# EAGLE board Lasermodul (EAGLE 7.2.0)
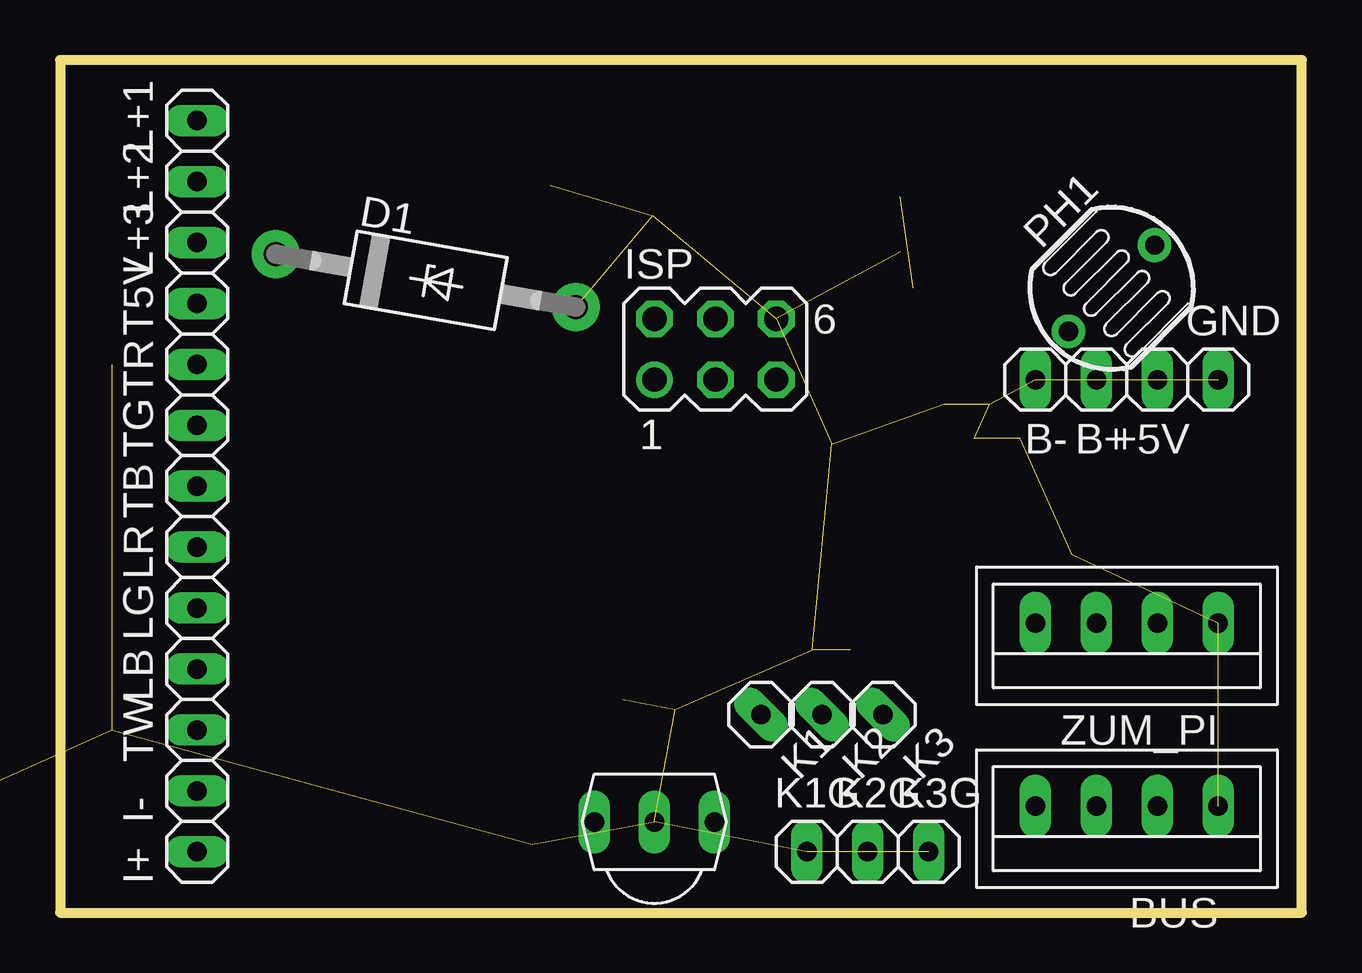
[diagram p0: board, top side]
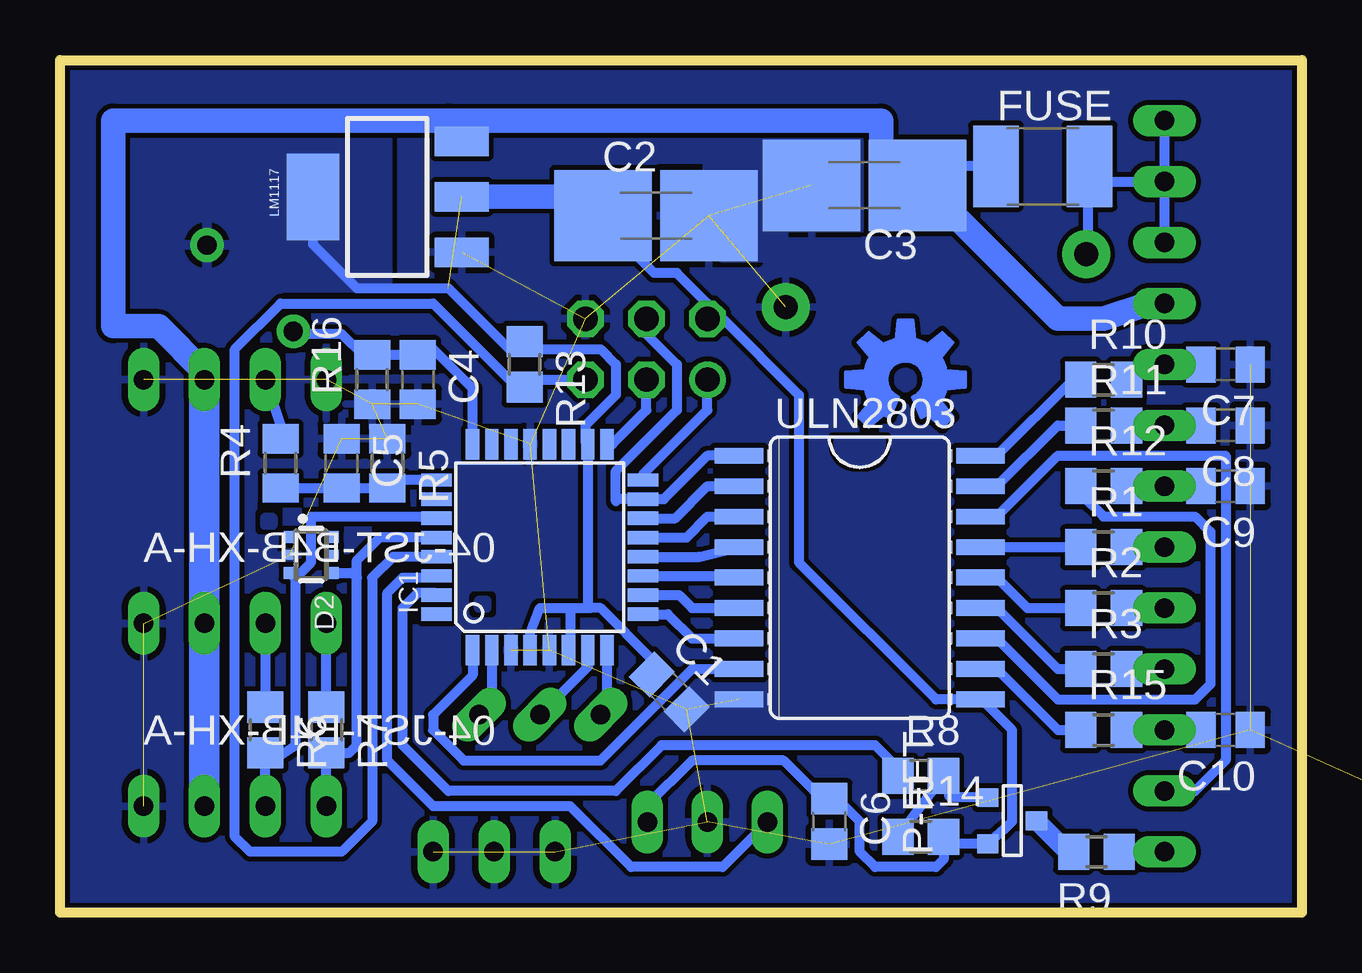
[diagram p1: board, bottom side, seen from below]

Size 51.74 x 35.55 mm. Coordinates in mm from the lower left corner, seen from the top.
Outline: 0,0 51.74,0 51.74,35.55 0,35.55 0,0
Copper layers (1*16): Top 0.035mm / dielectric 1.5mm / Bottom 0.035mm
Design rules "cnc *": minimum track width 10mil, minimum drill 0.1mm, track to track 8mil, track to pad 8mil, pad to pad 8mil, via to via 8mil, smd to smd 8mil, copper to edge 8mil, drill to drill 8mil, minimum pad ring 10mil, minimum via ring 8mil, stop-mask expansion 4mil, vias tented up to drill 0mil, thermal gap 10mil
Net classes: 0 default: width 0.016 mm

## Footprints (pad centres in the part's own frame; a part is rotated, then mirrored left to right if it is on the bottom)
1X01 = drill 0.813 long: 1 0,0
B4B-XH = drill 0.813 long: P$1 -3.81,0; P$2 -1.27,0; P$3 1.27,0; P$4 3.81,0
C0805 = smd 1.224 x 1.5: 1 -1.026,0; 2 1.026,0
C1808 = smd 4.064 x 3.81: 1 -2.204,0; 2 2.204,0
C0805' = smd 1.3 x 1.5: 1 -0.95,0; 2 0.95,0
C_UNIVERSAL = smd 4.064 x 3.81: 1 -2.204,0; 2 2.204,0
F126Z12 = drill 1 pad 2: A 6.35,0; C -6.35,0
SOT363 = smd 0.5 x 0.5: 1 -0.75,-0.9; 3 0.75,-0.9; 4 0.75,0.9; 6 -0.75,0.9 | smd 0.4 x 0.5: 2 0,-0.9; 5 0,0.9
L1812 = smd 1.9 x 3.4: 1 -1.95,0; 2 1.95,0
TQFP32-08 = smd 1.27 x 0.559: 1 -4.293,2.8; 2 -4.293,2; 3 -4.293,1.2; 4 -4.293,0.4; 5 -4.293,-0.4; 6 -4.293,-1.2; 7 -4.293,-2; 8 -4.293,-2.8; 17 4.293,-2.8; 18 4.293,-2; 19 4.293,-1.2; 20 4.293,-0.4; 21 4.293,0.4; 22 4.293,1.2; 23 4.293,2; 24 4.293,2.8 | smd 0.559 x 1.27: 9 -2.8,-4.293; 10 -2,-4.293; 11 -1.2,-4.293; 12 -0.4,-4.293; 13 0.4,-4.293; 14 1.2,-4.293; 15 2,-4.293; 16 2.8,-4.293; 25 2.8,4.293; 26 2,4.293; 27 1.2,4.293; 28 0.4,4.293; 29 -0.4,4.293; 30 -1.2,4.293; 31 -2,4.293; 32 -2.8,4.293
TO263-5 = smd 1.067 x 2.159: 1 -3.404,-5.791; 2 -1.702,-5.791; 3 0,-5.791; 4 1.702,-5.791; 5 3.404,-5.791 | smd 10.8 x 10.41: 6 0,2.54
MA03-2 = drill 1.016: 1 -2.54,-1.27 | drill 1.016 octagon: 2 -2.54,1.27; 3 0,-1.27; 4 0,1.27; 5 2.54,-1.27; 6 2.54,1.27
SOT223 = smd 1.219 x 2.235: 1 -2.311,-3.099; 2 0,-3.099; 3 2.311,-3.099 | smd 3.6 x 2.2: 4 0,3.099
SOT-23 = smd 0.787 x 0.889: 1 0.025,-1.016; 2 -0.94,1.016; 3 0.991,1.016
VT800 = drill 0.8 pad 1.4: 1 -2.54,0; 2 2.54,0
R0805 = smd 1.3 x 1.5: 1 -0.95,0; 2 0.95,0
R0805' = smd 1.224 x 1.5: 1 -1.026,0; 2 1.026,0
TSOP18XX = drill 0.813 long: GND -0.001,-0.027; OUT -2.501,-0.027; VCC 2.499,-0.027
SO18W = smd 0.66 x 2.032: 1 -5.08,-5.029; 2 -3.81,-5.029; 3 -2.54,-5.029; 4 -1.27,-5.029; 5 0,-5.029; 6 1.27,-5.029; 7 2.54,-5.029; 8 3.81,-5.029; 9 5.08,-5.029; 10 5.08,5.029; 11 3.81,5.029; 12 2.54,5.029; 13 1.27,5.029; 14 0,5.029; 15 -1.27,5.029; 16 -2.54,5.029; 17 -3.81,5.029; 18 -5.08,5.029

## Placement (x,y rotation side)
+5V  [1X01]  45.72,22.23 180 top
B+  [1X01]  43.18,22.23 180 top
B-  [1X01]  40.64,22.23 180 top
BUS  04-JST-B4B-XH-A  [B4B-XH]  44.45,4.45 180 top
C1  100n  [C0805]  26.35,9.21 315 bottom
C2  100u  [C1808]  26.91,29.06 0 bottom
C3  100u  [C1808]  18.21,30.33 180 bottom
C4  100n  [C0805]  36.83,22.23 270 bottom
C5  100n  [C0805]  40.01,18.73 270 bottom
C6  100n  [C0805']  19.68,3.81 270 bottom
C7  5u  [C0805]  3.17,22.86 180 bottom
C8  5u  [C0805]  3.17,20.32 180 bottom
C9  5u  [C0805]  3.17,17.78 180 bottom
C10  5u  [C0805]  3.17,7.62 180 bottom
C11  [C_UNIVERSAL]  -12.7,-5.08 0 top  (outside the outline)
D1  5,6V  [F126Z12]  15.24,26.35 350 top
D2  [SOT363]  41.27,14.92 270 bottom
FUSE  PTC  [L1812]  10.79,31.11 0 bottom
GND  [1X01]  48.26,22.23 0 top
I+  [1X01]  5.71,2.54 90 top
I-  [1X01]  5.71,5.08 90 top
IC1  MEGA8-AI  [TQFP32-08]  31.75,15.24 90 bottom
IC2  XL6009S  [TO263-5]  -10.16,6.35 0 top  (outside the outline)
ISP  [MA03-2]  27.3,23.5 0 top
K1  [1X01]  29.21,8.26 225 top
K1G  [1X01]  31.11,2.54 0 top
K2  [1X01]  31.75,8.26 225 top
K2G  [1X01]  33.66,2.54 0 top
K3  [1X01]  34.29,8.26 225 top
K3G  [1X01]  36.2,2.54 0 top
L+1  [1X01]  5.71,33.02 90 top
L+2  [1X01]  5.71,30.48 90 top
L+3  [1X01]  5.71,27.94 90 top
LB  [1X01]  5.71,10.16 90 top
LG  [1X01]  5.71,12.7 90 top
LM1117  V_REG_MIC2920  [SOT223]  38.1,29.84 90 bottom
LOGO1  OSHW-LOGOM  [OSHW-LOGO-M]  16.51,22.23 0 top
LR  [1X01]  5.71,15.24 90 top
P-FET  [SOT-23]  12.06,3.81 90 bottom
PH1  VT80N1  [VT800]  43.81,26.04 225 top
R1  100  [R0805]  8.26,15.24 0 bottom
R2  [R0805]  8.26,12.7 0 bottom
R3  [R0805]  8.26,10.16 0 bottom
R4  120k  [R0805']  42.55,18.73 90 bottom
R5  10k  [R0805']  38.1,18.73 270 bottom
R6  100  [R0805]  43.18,7.62 270 bottom
R7  100  [R0805]  40.64,7.62 270 bottom
R8  10  [R0805]  15.88,5.71 0 bottom
R9  10  [R0805]  8.55,2.54 180 bottom
R10  6R9 (10 || 22)  [R0805]  8.26,22.23 0 bottom
R11  4R7  [R0805]  8.26,20.32 0 bottom
R12  4R7  [R0805]  8.26,17.78 0 bottom
R13  10k  [R0805]  32.38,22.86 270 bottom
R14  10k  [R0805]  15.88,3.17 0 bottom
R15  4R7  [R0805]  8.26,7.62 0 bottom
R16  10k  [R0805']  38.73,22.23 90 bottom
T5V  [1X01]  5.71,25.4 90 top
TB  [1X01]  5.71,17.78 90 top
TG  [1X01]  5.71,20.32 90 top
TR  [1X01]  5.71,22.86 90 top
TW  [1X01]  5.71,7.62 90 top
U$1  TSOP1838  [TSOP18XX]  24.77,3.81 0 top
ULN2803  [SO18W]  18.41,13.97 270 bottom
ZUM_PI  04-JST-B4B-XH-A  [B4B-XH]  44.45,12.06 180 top

## Library data of the parts
+5V B+ B- BUS C1 C4 C5 C7-C11 D1 D2 GND I+ I- IC2 K1 K1G K2 K2G K3 K3G L+1-L+3 LB LG LM1117 LOGO1 LR R4 R5 R16 T5V TB TG TR TW ULN2803 ZUM_PI = wz
C2 C3 = wz_c
C6 R1-R3 R6-R15 = rcl
FUSE = resistor
IC1 = atmel; MPN: ATMEGA8-16AU; OC_FARNELL: 9171371; OC_NEWARK: 73M8863
ISP = con-lstb; OC_FARNELL: unknown; OC_NEWARK: unknown
P-FET = zetex; OC_FARNELL: unknown; OC_NEWARK: unknown
PH1 = photo-elements
U$1 = tsop

## Nets
+3V3: C1.1 C2.1 C6.1 IC1.4 IC1.6 IC1.18 ISP.2 LM1117.2 LM1117.4 P-FET.2 PH1.1 R13.1 R14.2 U$1.VCC ULN2803.10
+5V: +5V.1 BUS.P$2 C3.1 FUSE.1 LM1117.3 T5V.1 ZUM_PI.P$2
GND: B-.1 BUS.P$1 C1.2 C2.2 C3.2 C4.2 C5.1 C6.2 C7.1 C8.1 C9.1 C10.1 D1.A D2.2 GND.1 IC1.3 IC1.5 IC1.21 IC2.1 ISP.6 K1G.1 K2G.1 K3G.1 LM1117.1 R5.1 R16.1 U$1.GND ULN2803.9 ZUM_PI.P$1
IR_TAKT_-: I-.1 ULN2803.16
IR_TX_+: I+.1 R9.1
KEY_1: IC1.8 K1.1
KEY_2: IC1.7 K2.1
KEY_3: IC1.2 K3.1
LASER_+: D1.C FUSE.2 L+1.1 L+2.1 L+3.1
LASER_B: R3.1 ULN2803.13
LASER_G: R2.1 ULN2803.14
LASER_R: R1.1 ULN2803.15
LED_B: R12.1 ULN2803.12
LED_G: R11.1 ULN2803.17
LED_R: R10.1 ULN2803.18
LED_W: R15.1 ULN2803.11
N$1: IC1.15 ISP.4 ULN2803.1
N$2: IC1.14 ULN2803.2
N$3: IC1.13 ULN2803.3
N$4: IC1.12 ULN2803.4
N$7: IC1.11 ULN2803.5
N$8: IC1.1 ULN2803.8
N$9: IC1.10 ULN2803.6
N$10: IC1.9 ULN2803.7
N$11: IC1.16 ISP.1
N$12: LR.1 R1.2
N$13: IC1.17 ISP.3
N$14: C5.2 IC1.25 R4.1 R5.2
N$15: C7.2 R10.2 TR.1
N$16: P-FET.1 R9.2
N$17: IC1.31 R8.1
N$18: LG.1 R2.2
N$19: LB.1 R3.2
N$20: P-FET.3 R8.2 R14.1
N$21: C8.2 R11.2 TG.1
N$22: C9.2 R12.2 TB.1
N$23: C10.2 R15.2 TW.1
N$26: C4.1 IC1.24 PH1.2 R16.2
N$27: R7.1 ZUM_PI.P$4
N$28: R6.1 ZUM_PI.P$3
RESET: IC1.29 ISP.5 R13.2
RX: IC1.30 U$1.OUT
SCL: BUS.P$4 D2.4 IC1.28 R7.2
SDA: BUS.P$3 D2.3 IC1.27 R6.2
V_BATT: B+.1 R4.2
VIN: IC2.4

## Tracks (layer width: path | path; a pad name or v marks a point on that pad's centre or on a via)
+3V3  (1 unrouted)
  Bottom 0.406: 30.48,12.7 30.48,11.02 IC1.6 30.48,10.88 | IC1.4 32.15,11.66 31.75,12.7 30.48,12.7 | ULN2803.10 15.24,8.89 20.95,14.61 20.95,21.59 24.13,24.77 ISP.2 24.77,25.4 26.04,26.67 26.99,26.67 27.62,27.3 27.94,29.02 C2.1 | ULN2803.10 13.34,8.89 12.06,7.62 12.06,3.81 12.37,3.5 P-FET.2 14.6,2.87 R14.2 14.93,2.22 15.24,1.91 17.78,1.91 18.41,2.54 18.41,3.81 19.05,4.45 C6.1 20.32,5.08 21.59,6.35 25.4,6.35 27.3,4.46 U$1.VCC | ULN2803.10 13.97,8.89 | LM1117.4 41.2,27.86 39.37,26.04 35.56,26.04 33.02,23.5 32.7,23.81 R13.1 32.38,23.5 29.21,23.5 28.57,22.86 28.57,21.59 29.84,20.32 29.84,19.63 IC1.18 29.75,12.79 29.66,12.7 | 26.67,10.16 26.9,9.93 C1.1 27.08,10.57 29.21,12.7 29.66,12.7 | 30.48,12.7 29.66,12.7
  Bottom 1.016: C2.1 29.92,29.84 LM1117.2
  pour Bottom: 38.1,32.38 38.1,26.04 42.55,26.04 45.72,22.86 48.9,25.4 48.9,32.38
+5V
  Bottom 0.406: 12.7,31.75 FUSE.1 15.23,31.11 C3.1 | 17.53,31.75 C3.1 | 33.33,33.02 LM1117.3 34.59,31.75 34.67,32.05 | C3.1 15.72,30.33 14.61,29.21
  Bottom 0.61: 35.56,33.02 33.33,33.02
  Bottom 1.016: T5V.1 6.35,25.4 8.26,24.77 10.16,24.77 14.61,29.21 | +5V.1 45.72,22.54 47.62,24.45 49.53,24.45 49.53,33.02 35.56,33.02 | 35.56,33.02 17.53,33.02 17.53,31.75 | 35.56,33.02 34.67,32.05
  Bottom 1.27: BUS.P$2 ZUM_PI.P$2 +5V.1
GND  (28 unrouted)
  pour Bottom (rank 2): 0,35.56 51.44,35.56 51.44,0 0,0
  pour Bottom (no thermals): 17.78,33.02 24.77,33.02 24.77,28.57 arc-90 24.13,27.3 21.59,27.3 21.59,28.57 17.78,28.57
  pour Bottom (no thermals): 22.23,9.53 26.04,9.53 27.3,6.99 22.23,7.62
IR_TAKT_-
  Bottom 0.406: ULN2803.16 12.7,16.51 10.16,19.05 3.17,19.05 3.17,6.35 4.45,5.08 I-.1
IR_TX_+
  Bottom 0.406: I+.1 R9.1
KEY_1
  Bottom 0.406: IC1.8 28.95,8.52 K1.1
KEY_2
  Bottom 0.406: IC1.7 29.75,10.26 K2.1
KEY_3
  Bottom 0.406: IC1.2 33.75,8.79 K3.1
LASER_+
  Bottom 0.406: 9.53,30.48 FUSE.2 8.85,30.52 8.89,30.48 | L+3.1 L+2.1 | L+2.1 L+1.1 | 8.89,30.48 L+2.1 | D1.C 8.89,27.45 8.89,30.48
LASER_B
  Bottom 0.406: ULN2803.13 12.7,12.7 10.16,10.16 R3.1
LASER_G
  Bottom 0.406: ULN2803.14 12.7,13.97 11.43,12.7 R2.1
LASER_R
  Bottom 0.406: ULN2803.15 R1.1
LED_B
  Bottom 0.406: ULN2803.12 12.7,11.43 10.16,8.89 4.45,8.89 3.81,9.53 3.81,15.88 4.45,16.51 8.26,16.51 9.21,17.46 R12.1
LED_G
  Bottom 0.406: ULN2803.17 12.7,17.78 10.16,20.32 R11.1
LED_R
  Bottom 0.406: ULN2803.18 12.7,19.05 9.53,22.23 R10.1
LED_W
  Bottom 0.406: ULN2803.11 12.7,10.16 10.16,7.62 R15.1
N$1
  Bottom 0.406: ISP.4 27.3,24.13 26.04,22.86 26.04,20.95 28.57,18.41 28.57,17.14 28.48,17.24 IC1.15 26.57,17.24 24.77,19.05 ULN2803.1
N$2
  Bottom 0.406: IC1.14 26.11,16.44 24.77,17.78 ULN2803.2
N$3
  Bottom 0.406: IC1.13 25.64,15.64 24.77,16.51 ULN2803.3
N$4
  Bottom 0.406: IC1.12 25.11,14.84 ULN2803.4
N$5
  pour Bottom: 34.29,12.7 34.29,13.02 33.97,13.02 33.97,12.7
N$6
  pour Bottom: 17.46,19.68 19.37,19.68 arc-90 18.41,18.73 arc-90
N$7
  Bottom 0.406: IC1.11 24.15,14.04 ULN2803.5
N$8
  Bottom 0.406: ULN2803.8 25.4,10.16 29.21,6.35 34.92,6.35 36.2,7.62 36.2,8.26 34.55,9.9 IC1.1
N$9
  Bottom 0.406: IC1.10 25.94,13.24 25.4,12.7 ULN2803.6
N$10
  Bottom 0.406: IC1.9 26.41,12.44 25.4,11.43 ULN2803.7
N$11
  Bottom 0.406: IC1.16 27.46,18.26 24.77,20.95 ISP.1
N$12
  Bottom 0.406: LR.1 R1.2
N$13
  Bottom 0.406: IC1.17 28.73,19.53 27.3,20.95 ISP.3
N$14
  Bottom 0.406: R4.1 C5.2 R5.2 37.84,18.04 IC1.25
N$15
  Bottom 0.406: R10.2 6.67,22.86 TR.1 C7.2
N$16
  Bottom 0.406: R9.2 9.75,2.54
  Bottom 0.813: 9.75,2.54 P-FET.1
N$17
  Bottom 0.406: IC1.31 36.14,13.34 36.83,13.34 37.47,12.7 37.47,6.99 35.56,5.08 28.57,5.08 26.67,6.99 17.78,6.99 17.14,6.35 R8.1
N$18
  Bottom 0.406: R2.2 LG.1
N$19
  Bottom 0.406: R3.2 LB.1
N$20
  Bottom 0.406: R14.1 R8.2 14.65,4.8 P-FET.3
N$21
  Bottom 0.406: R11.2 TG.1 C8.2
N$22
  Bottom 0.406: R12.2 TB.1 C9.2
N$23
  Bottom 0.406: R15.2 TW.1 C10.2
N$26
  Bottom 0.406: PH1.2 41.91,24.13 40.01,24.13 39.05,23.18 R16.2 C4.1 36.52,22.86 36.2,23.5 34.55,21.85 IC1.24
N$27
  Bottom 0.406: R7.1 ZUM_PI.P$4
N$28
  Bottom 0.406: ZUM_PI.P$3 R6.1
N$29
  pour Bottom: 42.88,16.48 42.88,16.16 43.2,16.16 43.2,16.48
RESET
  Bottom 0.406: ISP.5 31.75,22.23 32.06,21.91 R13.2 32.7,21.91 36.2,25.4 42.55,25.4 44.45,23.5 44.45,3.17 43.81,2.54 40.01,2.54 38.73,3.81 38.73,13.97 37.87,14.84 IC1.29
RX
  Bottom 0.406: IC1.30 36.11,13.97 37.47,13.97 38.1,13.34 38.1,6.35 36.2,4.45 30.48,4.45 27.94,1.91 24.13,1.91 U$1.OUT
SCL
  Bottom 0.406: 39.37,13.97 39.37,6.99 39.69,6.67 R7.2 BUS.P$4 | 39.37,13.97 39.37,14.69 38.42,15.64 IC1.28 | D2.4 39.57,14.17 39.37,13.97
SDA
  Bottom 0.406: IC1.27 36.11,16.51 41.27,16.51 41.27,14.61 41.71,14.17 D2.3 41.91,13.91 41.91,6.99 42.86,6.35 R6.2 BUS.P$3
V_BATT
  Bottom 0.406: R4.2 42.55,20.32 B+.1